# Altium PCB PCB4.PcbDoc
Units mm, origin at the board's own origin, x right, y up, seen from the top; angles counter-clockwise.
Board outline 40 x 55 mm, 2 copper layers (Top Layer, Bottom Layer); 19 components, 18 nets, 83 pads, 44 vias.
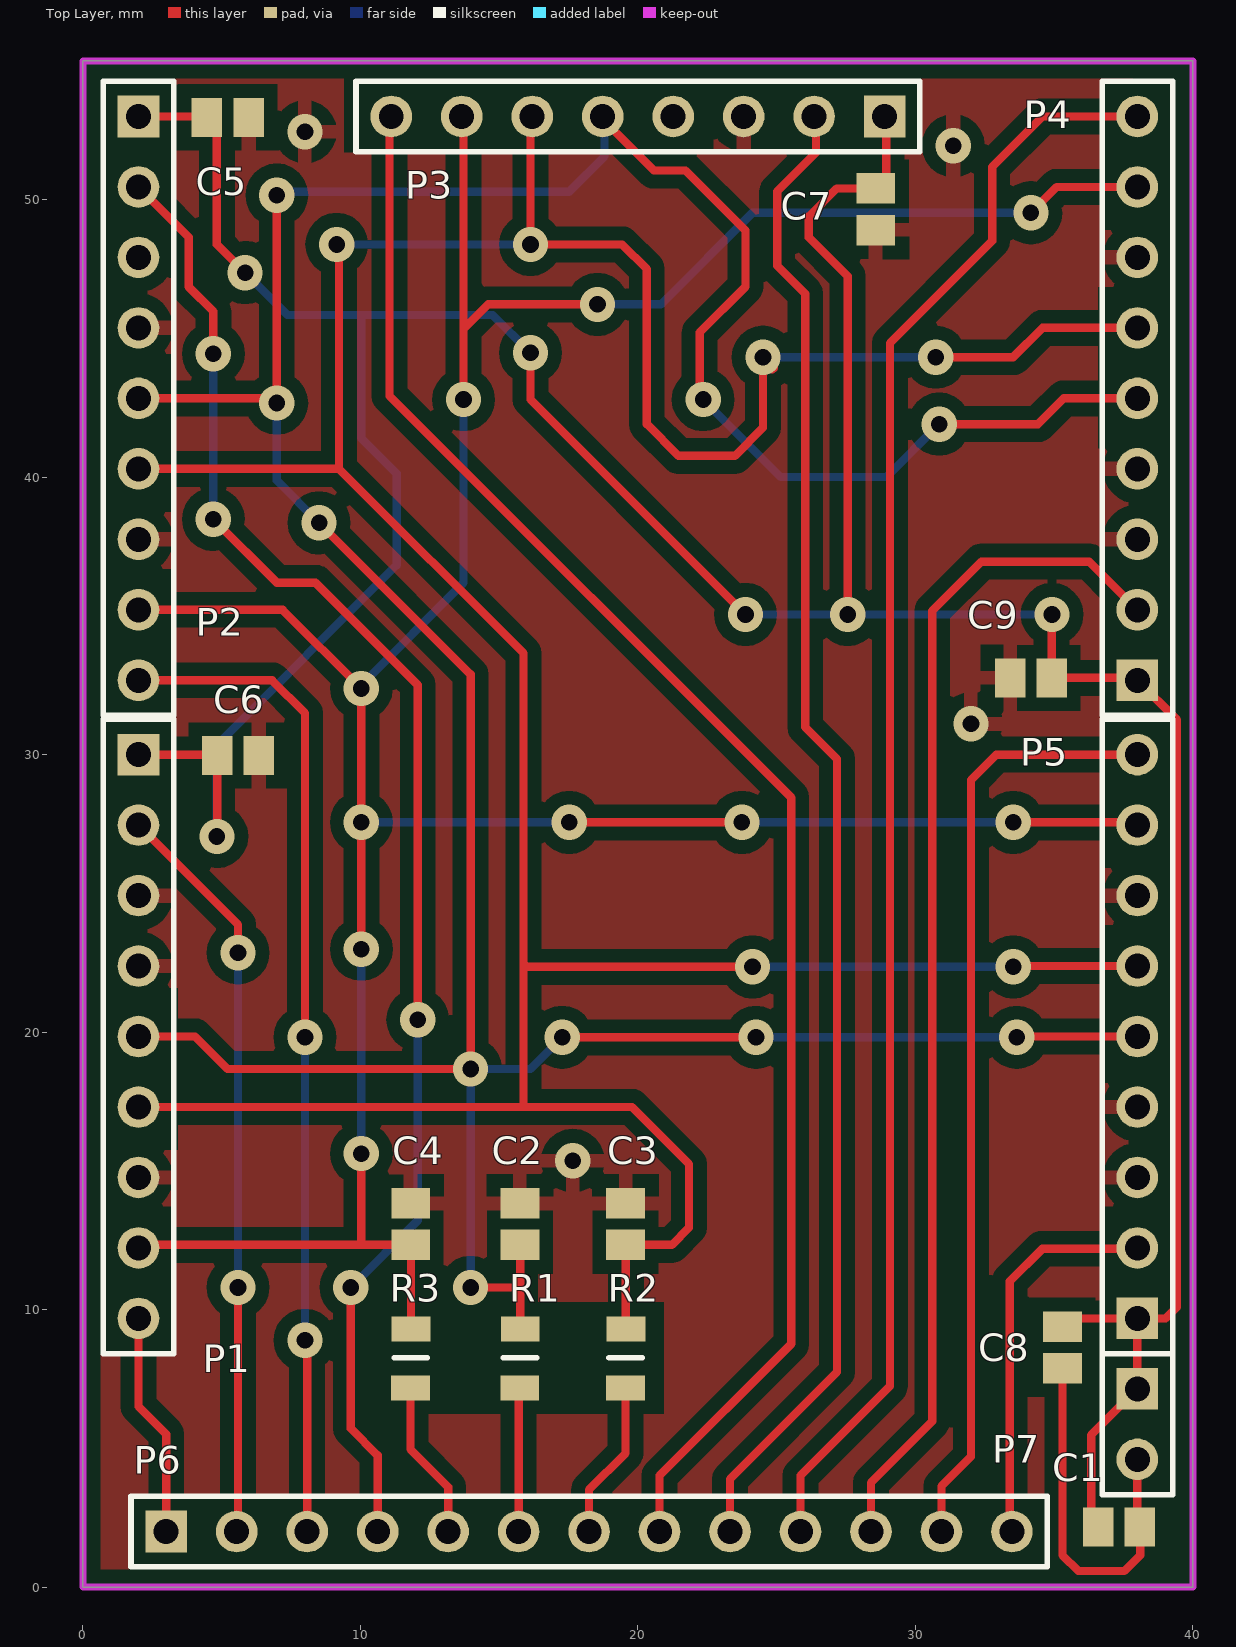
[diagram p0: Top Layer view]
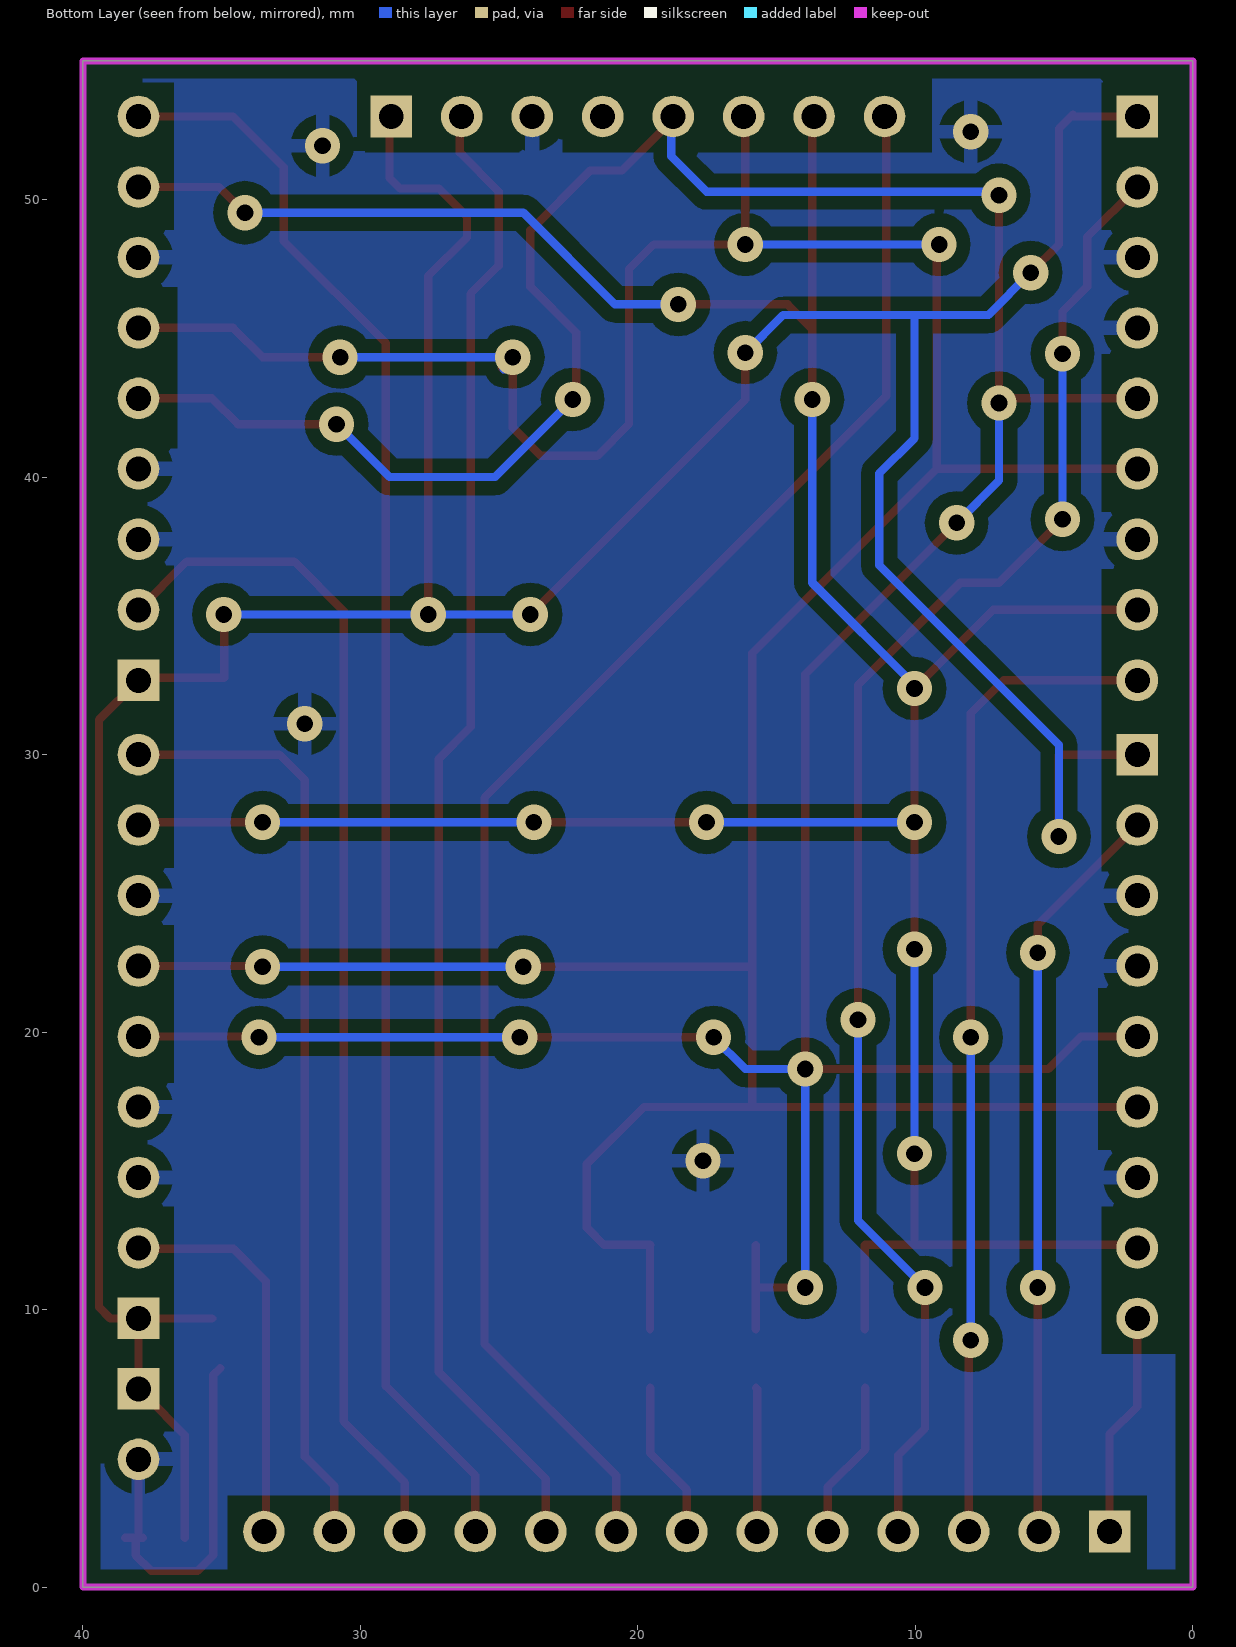
[diagram p1: Bottom Layer view, seen from below]

## Layer stack, top to bottom
Top Solder: solder mask 0.0102, Solder Resist, Dk 3.5
Top Layer: signal copper 0.0356
Dielectric 1: dielectric 0.32, FR-4, Dk 4.8
Bottom Layer: signal copper 0.0356
Bottom Solder: solder mask 0.0102, Solder Resist, Dk 3.5

## Board outline
0,0 40,0 40,55 0,55

## Design rules (kind name [scope] priority, off if disabled: settings)
AssemblyTestPointUsage [All] p1 off:
AssemblyTestpoint [All] p1 off: testpointundercomponent=TRUE minsize=1.016 maxsize=2.54 preferedsize=1.524 minholesize=0 maxholesize=1.016 preferedholesize=0.813 testpointgrid=0.025 usegrid=TRUE gridtolerance=0 allowsidetop=TRUE allowsidebottom=TRUE
Clearance [All] p1: gap=0.3
ComponentClearance [All] p1 off: gap=0.254 collisioncheckmode=3 verticalgap=0.254 showdistances=FALSE
DiffPairsRouting [All] p1 off: maxlimit=0.254 minlimit=0.254 mostfreqgap=0.254 toplayer_minwidth=0.381 toplayer_maxwidth=0.381 toplayer_prefwidth=0.381 bottomlayer_minwidth=0.381 bottomlayer_maxwidth=0.381 bottomlayer_prefwidth=0.381 maxuncoupledlength=12.7
FabricationTestPointUsage [All] p1 off: valid=0 allowmultiple=FALSE
FabricationTestpoint [All] p1 off: side=3 testpointundercomponent=TRUE minsize=1.016 maxsize=2.54 preferedsize=1.524 minholesize=0 maxholesize=1.016 preferedholesize=0.813 testpointgrid=0.025 allowsidetop=TRUE allowsidebottom=TRUE usegrid=TRUE gridtolerance=0
FanoutControl Fanout_BGA [IsBGA] p1 off: bgadir=Out bgaviamode=Centered fanoutstyle=Auto fanoutdirection=Alternating viagrid=0.025 // Fanout_BGA (Default Rule)
FanoutControl Fanout_LCC [IsLCC] p2 off: bgadir=Out bgaviamode=Centered fanoutstyle=Auto fanoutdirection=Alternating viagrid=0.025 // Fanout_LCC (Default Rule)
FanoutControl Fanout_SOIC [IsSOIC] p3 off: bgadir=Out bgaviamode=Centered fanoutstyle=Auto fanoutdirection=Alternating viagrid=0.025 // Fanout_SOIC (Default Rule)
FanoutControl Fanout_Small [(CompPinCount < 5)] p4 off: bgadir=Out bgaviamode=Centered fanoutstyle=Auto fanoutdirection=OutThenIn viagrid=0.025 // Fanout_Small (Default Rule)
FanoutControl Fanout_Default [All] p5 off: bgadir=Out bgaviamode=Centered fanoutstyle=Auto fanoutdirection=Alternating viagrid=0.025 // Fanout_Default (Default Rule)
Height [All] p1 off: minheight=0 maxheight=25.4 prefheight=12.7
HoleSize [All] p1 off: absolutevalues=TRUE maxlimit=2.54 minlimit=0.025 maxpercent=80.000 minpercent=20.000
HoleToHoleClearance [All] p1 off: gap=0.254 allowstackedmicrovias=TRUE
LayerPairs [All] p1 off: enforce=TRUE
MinimumSolderMaskSliver [All] p1 off: minsoldermaskwidth=0.254
NetAntennae [All] p1 off: netantennaetolerance=0
PlaneConnect [All] p1: planeconnectstyle=Relief reliefexpansion=0.5 reliefentries=4 reliefconductorwidth=0.5 reliefairgap=0.5
PolygonConnect [All] p1: connectstyle=Relief reliefconductorwidth=0.5 reliefentries=4 polygonreliefangle="90 Angle" airgapwidth=0.5
RoutingCorners [All] p1 off: cornerstyle=45-Degree minsetback=2.54 maxsetback=2.54
RoutingLayers [All] p1 off: top layer_v5=TRUE bottom layer_v5=TRUE
RoutingPriority [All] p1 off: routingpriority=0
RoutingTopology [All] p1 off: topology=Shortest
RoutingVias [All] p1 off: holewidth=0.6 width=1.5 viastyle="Through Hole" minholewidth=0.6 minwidth=1.27 maxholewidth=0.9 maxwidth=1.6
SilkToBoardRegionClearance [All] p1 off:
SilkToSilkClearance [All] p1 off: silktosilkclearance=0.1
SilkToSolderMaskClearance [IsPad] p1 off: minsilkscreentomaskgap=0.1 clearancetoexposedcopper=TRUE
SolderMaskExpansion [All] p1: expansion=0.102
Width [All] p1 off: maxlimit=0.5 minlimit=0.3 preferedwidth=0.3
4 further rules are at their usual default settings.

## Components (designator, comment, footprint, x,y, rotation, side; value= is the part's Value field where it differs from the comment)
C1 "Cap" C0805 37.338,2.159 r180 top
C2 "Cap" C0805 15.748,13.081 r270 top
C3 "Cap" C0805 19.558,13.081 r90 top
C4 "Cap" C0805 11.811,13.081 r90 top
C5 "Cap" C0805 5.219,52.959 r180 top
C6 "Cap" C0805 5.588,29.972 r180 top
C7 "Cap" C0805 28.575,49.657 r90 top
C8 "Cap" C0805 35.306,8.636 r90 top
C9 "Cap" C0805 34.163,32.766 r0 top
P1 "Header 9" HDR1X9 2,30 r270 top locked
P2 "Header 9" HDR1X9 2,53 r270 top locked
P3 "Header 8" HDR1X8 28.89,53 r180 top locked
P4 "Header 9" HDR1X9 38,32.68 r90 top locked
P5 "Header 9" HDR1X9 38,9.68 r90 top locked
P6 "Header 13" HDR1X13 3,2 r0 top locked
P7 "Header 2" HDR1X2 38,7.14 r270 top locked
R1 "Res2" 6-0805_N 15.748,8.255 r270 top
R2 "Res2" 6-0805_N 19.558,8.255 r270 top
R3 "Res2" 6-0805_N 11.811,8.255 r270 top

## Footprints (in the part's own frame and the unit in brackets; to place one, negate y for a bottom-side part, rotate by r counter-clockwise, add the part's x,y. Pads: shape width x height; smd on the part's side, far side on the other; paste and mask are expansions set on the pad)
6-0805_N [mm] "Chip Resistor, Body 2.0x1.2mm, IPC Medium Density"
  rect 0.9x1.4 smd: 1(-1.039,0.009) 2(1.078,-0.007)
  silkscreen extent 0,-0.6 0,0.6, body extent -1.07,-0.7 1.07,0.7, height 0.7
C0805 [mm]
  rect 1.1x1.4 smd: 1(-0.75,0) 2(0.75,0)
  body extent -1.1,-0.72 1.1,0.72, height 1.4
HDR1X2 [mm] "Connector; Header; 2 Position"
  rect 1.5x1.5 hole 0.9: 1(0,0)
  round 1.5 hole 0.9: 2(2.54,0)
  silkscreen extent -1.27,-1.27 3.81,1.27
HDR1X8 [mm] "Connector; Header; 8 Position"
  rect 1.5x1.5 hole 0.9: 1(0,0)
  round 1.5 hole 0.9: 2(2.54,0) 3(5.08,0) 4(7.62,0) 5(10.16,0) 6(12.7,0) 7(15.24,0) 8(17.78,0)
  silkscreen extent -1.27,-1.27 19.05,1.27
HDR1X9 [mm] "Connector; Header; 9 Position"
  rect 1.5x1.5 hole 0.9: 1(0,0)
  round 1.5 hole 0.9: 2(2.54,0) 3(5.08,0) 4(7.62,0) 5(10.16,0) 6(12.7,0) 7(15.24,0) 8(17.78,0) 9(20.32,0)
  silkscreen extent -1.27,-1.27 21.59,1.27
HDR1X13 [mm] "Connector; Header; 13 Position"
  rect 1.5x1.5 hole 0.9: 1(0,0)
  round 1.5 hole 0.9: 2(2.54,0) 3(5.08,0) 4(7.62,0) 5(10.16,0) 6(12.7,0) 7(15.24,0) 8(17.78,0) 9(20.32,0) 10(22.86,0) 11(25.4,0) 12(27.94,0) 13(30.48,0)
  silkscreen extent -1.27,-1.27 31.75,1.27

## Part data
C1 C2 C3 C4 C5 C6 C7 C8 C9: "Capacitor"
P1 P2 P4 P5: "Header, 9-Pin"
P3: "Header, 8-Pin"
P6: "Header, 13-Pin"
P7: "Header, 2-Pin"
R1 R2 R3: "Resistor"

## Via types
v1: diameter 1.27, hole 0.6, Top Layer to Bottom Layer, 44 vias

## Nets (pads, with @x,y where several pads share a name; then routed paths per layer and width w, separated by ;. In a path a pad name is that pad's centre, name@x,y a point inside that pad or via, vN(x,y) a via of type N, cw(c..) or ccw(c..) an arc to the next point about the centre after c; other vN are vias at no path point)
3.3V: C1.2 C5.2 C6.2 C7.2 C8.2 C9.2 P1.1 P2.1 P3.1 P4.1 P5.1 P7.1 | length 133.3
  Top Layer w0.3: P1.1 4.81,30 C6.2 v1@4.838,27.051 ; P2.1 4.318,53 4.318,53.074 4.826,52.566 4.826,48.387 v1(5.842,47.371) ; v1(16.129,44.485) 16.129,42.799 v1(23.876,35.052) ; v1(27.559,35.052) 27.559,47.244 26.162,48.641 26.162,49.403 27.166,50.407 C7.2 28.956,50.788 28.956,52.614 P3.1@28.57,53 ; v1(34.925,35.052) 34.913,35.04 C9.2 P4.1@37.914,32.766 ; C8.2@35.346,9.68 P5.1 ; C1.2@36.334,1.778 36.334,5.473 37.719,6.858 P7.1@37.846,6.858 ; P7.1@38,7.112 P5.1 ; P4.1 39.423,31.257 39.423,10.086 39.017,9.68 P5.1
  Bottom Layer w0.3: v1@4.838,27.178 4.826,27.19 4.826,30.353 11.303,36.83 11.303,40.132 10.033,41.402 10.033,45.847 ; v1(5.842,47.371) 7.366,45.847 10.033,45.847 ; v1(16.129,44.485) 14.767,45.847 10.033,45.847 ; v1(23.876,35.052) v1(27.559,35.052) v1(34.925,35.052)
  other v1: 4.826,27.051
GND: C1.1 C2.1 C3.2 C4.2 C5.1 C6.1 C7.1 C8.1 C9.1 P1.3 P1.4 P1.7 P2.3 P2.4 P2.7 P3.3 P4.3 P4.4 P4.7 P5.3 P5.4 P5.7 P7.2 | length 14.4
  Top Layer w0.3: C8.1@35.052,7.886 35.306,7.632 35.306,1.143 35.872,0.577 37.534,0.577 38.1,1.143 38.1,1.651 C1.1@38.227,1.778 ; P7.2@37.746,4.826 38,4.572 C1.1@38,1.944 ; C1.1@37.834,1.778 C1.1@38.481,1.778
  other v1: 17.653,15.367 32.004,31.115 31.369,51.943 8.001,52.451
MISO: C2.2 P1.5 P2.5 P3.5 P4.5 P5.5 R1.1 | length 134.5
  Top Layer w0.3: P1.5 4.036,19.84 5.207,18.669 v1(13.97,18.669) 13.97,32.893 8.89,37.973 v1@8.89,38.1 ; P2.5 6.69,42.84 v1@6.858,42.672 ; v1@6.858,49.784 6.985,49.657 v1(6.985,42.672) ; v1(13.97,10.795) 15.757,10.795 ; R1.1 15.757,10.795 ; C2.2@15.757,12.322 15.757,10.795 ; v1(17.272,19.812) v1(24.257,19.812) ; P3.5@18.41,53 18.628,53 20.574,51.054 21.717,51.054 23.876,48.895 23.876,46.863 22.225,45.212 v1@22.225,42.799 ; v1(30.861,41.91) 34.417,41.91 35.347,42.84 P4.5 ; v1(33.655,19.812) 33.683,19.84 P5.5
  Bottom Layer w0.3: v1@6.858,42.672 6.858,42.291 6.985,42.164 6.985,39.878 v1(8.509,38.354) ; v1@6.858,49.784 7.366,50.292 17.526,50.292 18.796,51.562 18.796,52.614 P3.5@18.41,53 ; v1(13.97,10.795) v1(13.97,18.669) 16.129,18.669 v1(17.272,19.812) ; v1(22.352,42.799) 25.146,40.005 28.956,40.005 v1(30.861,41.91) ; v1(24.257,19.812) v1(33.655,19.812)
  other v1: 6.985,50.165
MOSI: C3.1 P1.6 P2.6 P3.6 P4.6 P5.6 R2.1 | length 135.5
  Top Layer w0.3: P1.6 19.784,17.3 21.844,15.24 21.844,12.954 21.221,12.331 C3.1 19.567,12.322 R2.1 ; P2.6 9.23,40.3 ; v1(9.144,48.387) 9.23,48.301 9.23,40.3 ; 15.875,17.3 15.875,22.479 ; P3.6@15.875,52.624 16.129,52.37 v1(16.129,48.387) 19.431,48.387 20.32,47.498 20.32,41.91 21.463,40.767 23.495,40.767 24.511,41.783 24.511,44.217 v1@24.844,43.884 ; v1(24.13,22.352) 16.002,22.352 15.875,22.479 ; v1@24.892,43.932 v1@24.902,43.942 ; v1(30.734,44.323) 33.528,44.323 34.585,45.38 P4.6 ; v1(33.528,22.352) 33.556,22.38 P5.6 ; 9.23,40.3 15.875,33.655 15.875,22.479
  Bottom Layer w0.3: v1(9.144,48.387) v1(16.129,48.387) ; v1(24.13,22.352) v1(33.528,22.352) ; v1@24.257,44.323 v1(30.734,44.323) ; v1@24.823,43.884 v1@24.844,43.884
  other v1: 24.511,44.323
NetP6_5: P6.5 R3.2 | length 5.7
  Top Layer w0.3: R3.2 11.804,4.96 13.16,3.604 P6.5
NetP6_6: P6.6 R1.2 | length 5.2
  Top Layer w0.3: P6.6 15.7,7.136 R1.2
NetP6_7: P6.7 R2.2 | length 5.7
  Top Layer w0.3: P6.7 18.24,3.508 19.551,4.819 R2.2
RST1: P1.2 P6.2 | length 27
  Top Layer w0.3: P1.2 5.588,23.872 v1(5.588,22.86) ; P6.2 5.588,2.048 v1(5.588,10.795)
  Bottom Layer w0.3: v1(5.588,10.795) v1(5.588,22.86)
RST2: P2.2 P6.4 | length 54.8
  Top Layer w0.3: P2.2 3.81,48.65 3.81,46.863 4.699,45.974 v1(4.699,44.45) ; v1(4.699,38.481) 6.985,36.195 8.382,36.195 12.065,32.512 v1(12.065,20.447) ; v1(9.652,10.795) 9.652,5.715 10.62,4.747 P6.4
  Bottom Layer w0.3: v1(4.699,38.481) v1(4.699,44.45) ; v1(9.652,10.795) 12.065,13.208 v1(12.065,20.447)
RST3: P3.2 P6.9 | length 54.2
  Top Layer w0.3: P6.9 23.32,3.889 27.178,7.747 27.178,29.845 26.03,30.993 26.03,46.614 25.019,47.625 25.019,50.297 26.416,51.694 26.416,52.614 P3.2@26.03,53
RST4: P4.2 P6.11 | length 42.9
  Top Layer w0.3: P6.11 28.4,3.762 30.607,5.969 30.607,35.179 32.385,36.957 36.263,36.957 P4.2
RST5: P5.2 P6.13 | length 14.1
  Top Layer w0.3: P6.13 33.401,2.079 33.401,11.018 34.575,12.192 37.972,12.192 P5.2
SCK: C4.1 P1.8 P2.8 P3.7 P4.8 P5.8 R3.1 | length 119.7
  Top Layer w0.3: P1.8 2.111,12.331 10.033,12.331 ; P2.8 7.198,35.22 v1(10.033,32.385) v1(10.033,27.559) v1(10.033,22.987) ; v1(10.033,15.621) 10.033,12.331 ; R3.1 11.82,12.322 C4.1 10.033,12.331 ; P3.7@13.33,53 13.716,52.614 13.716,43.053 v1@13.335,42.672 ; 13.716,45.339 14.605,46.228 18.288,46.228 v1@18.479,46.038 ; v1(17.526,27.559) v1(23.749,27.559) ; v1(33.528,27.559) 37.901,27.559 P5.8 ; v1(34.163,49.53) 35.093,50.46 P4.8
  Bottom Layer w0.3: v1(10.033,15.621) v1(10.033,22.987) ; v1(10.033,27.559) v1(17.526,27.559) ; v1(10.033,32.385) 10.033,32.512 13.716,36.195 13.716,42.291 13.335,42.672 v1@13.335,42.799 ; v1(18.542,46.228) 20.828,46.228 24.13,49.53 v1(34.163,49.53) ; v1(23.749,27.559) v1(33.528,27.559) v1@33.909,27.559
  other v1: 13.716,42.799
SS1: P1.9 P6.1 | length 8.1
  Top Layer w0.3: P1.9 2,6.509 3,5.509 P6.1
SS2: P2.9 P6.3 | length 36
  Top Layer w0.3: P2.9 6.817,32.68 8.001,31.496 v1(8.001,19.812) ; v1(8.001,8.89) 8.08,8.811 P6.3
  Bottom Layer w0.3: v1(8.001,8.89) v1(8.001,19.812)
SS3: P3.8 P6.8 | length 59.1
  Top Layer w0.3: P3.8@10.79,53 11.049,52.741 11.049,42.926 25.527,28.448 25.527,8.763 20.78,4.016 P6.8
SS4: P4.9 P6.10 | length 58
  Top Layer w0.3: P6.10 25.86,4.016 29.083,7.239 29.083,44.831 32.766,48.514 32.766,51.181 34.585,53 P4.9
SS5: P5.9 P6.12 | length 33.9
  Top Layer w0.3: P6.12 30.94,3.635 32.004,4.699 32.004,29.083 32.921,30 P5.9
pads on no net: P3.4

## Polygon pours and split planes (outlines as drawn)
GND on Bottom Layer "Bottom Layer-No Net" (solid, pour order 4): 0,55 40,55 40,0 0,0
GND on Top Layer "Bottom Layer-No Net" (solid, pour order 6): 0,55 40,55 40,0 0,0

## Keep-outs
Keep-Out Layer:
  the board outline again, w0.254

## Other copper
Top Layer:
  pour cut-out: 10.16,10.287 20.955,10.287 20.955,6.227 10.16,6.227
Multi-Layer:
  pour cut-out: 0.635,54.229 3.302,54.229 3.302,48.895 0.635,48.895
  pour cut-out: 0.635,44.45 3.302,44.45 3.302,38.735 0.635,38.735
  pour cut-out: 0.635,36.703 3.302,36.703 3.302,25.781 0.635,25.781
  pour cut-out: 0.762,21.59 3.429,21.59 3.429,15.748 0.762,15.748
  pour cut-out: 0.635,13.716 3.302,13.716 3.302,8.382 0.635,8.382
  pour cut-out: 39.37,48.895 36.703,48.895 36.703,54.229 39.37,54.229
  pour cut-out: 39.243,41.021 36.576,41.021 36.576,46.863 39.243,46.863
  pour cut-out: 39.37,25.908 36.703,25.908 36.703,36.83 39.37,36.83
  pour cut-out: 39.37,18.161 36.703,18.161 36.703,23.876 39.37,23.876
  pour cut-out: 39.37,5.588 36.703,5.588 36.703,13.716 39.37,13.716
  pour cut-out: 1.651,3.302 1.651,0.635 34.798,0.635 34.798,3.302
  pour cut-out: 9.398,54.356 22.733,54.356 22.733,51.689 9.398,51.689
  pour cut-out: 24.257,54.356 24.257,51.689 29.845,51.689 29.845,54.356